# Altium PCB LED Bar.PcbDoc
Units mm, origin at the board's own origin, x right, y up, seen from the top; angles counter-clockwise.
Board outline 55 x 24 mm, 2 copper layers (Top Layer, Bottom Layer); 8 components, 12 nets, 30 pads, 0 vias.
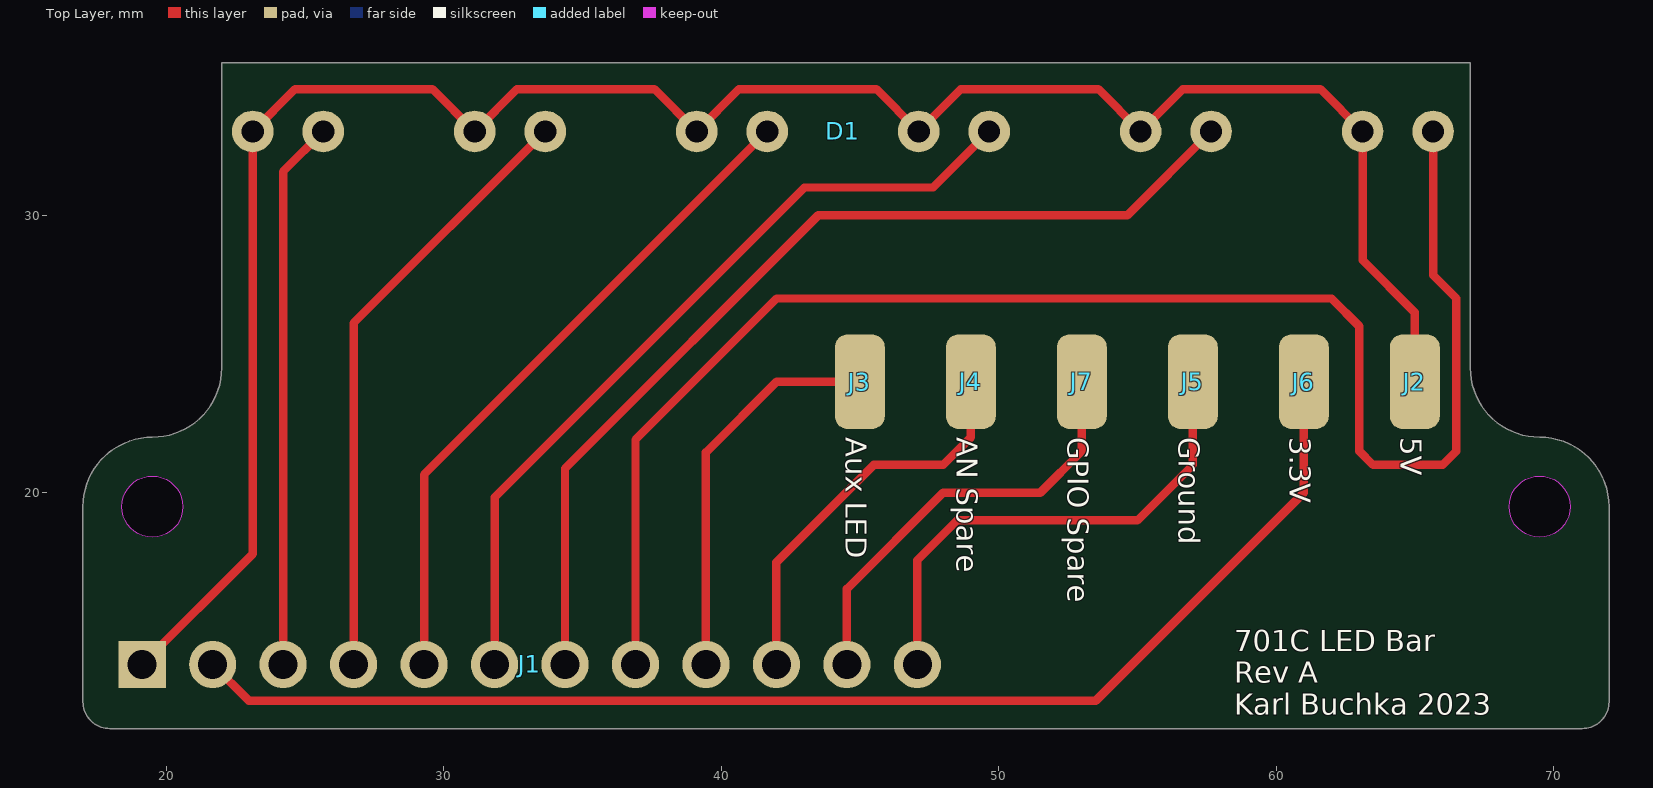
[diagram p0: Top Layer view]
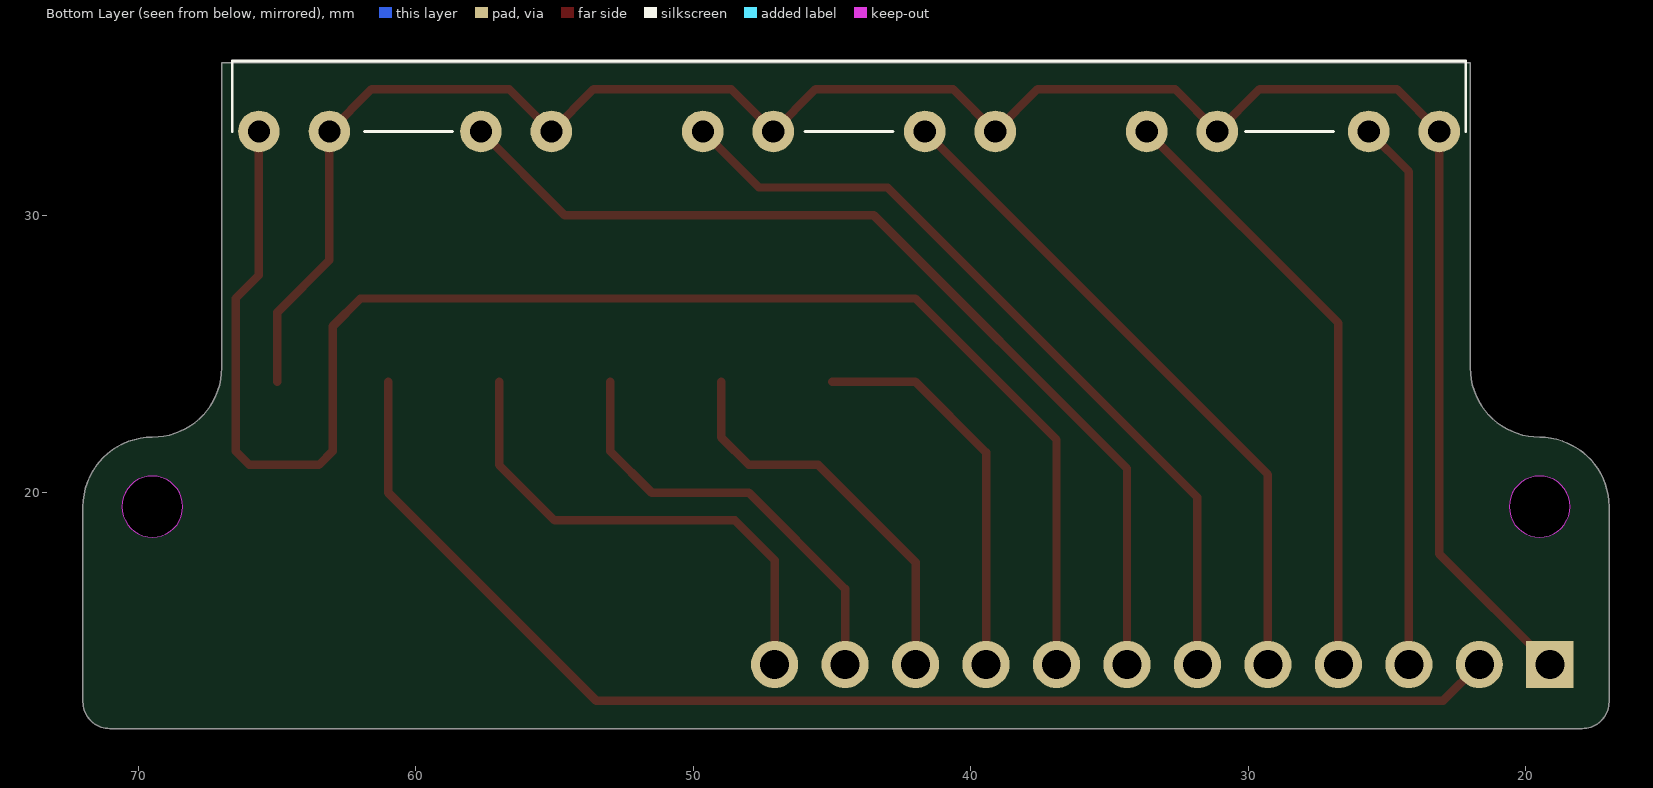
[diagram p1: Bottom Layer view, seen from below]

## Layer stack, top to bottom
Top Solder: solder mask 0.0102, Solder Resist, Dk 3.5
Top Layer: signal copper 0.0356
Dielectric 1: dielectric 0.32, FR-4, Dk 4.8
Bottom Layer: signal copper 0.0356
Bottom Solder: solder mask 0.0102, Solder Resist, Dk 3.5

## Board outline
17,12.464 ccw(c17.964,12.464) 17.964,11.5 71.036,11.5 ccw(c71.036,12.464) 72,12.464 72,19.5 ccw(c69.5,19.5) 69.5,22 cw(c69.5,24.5) 67,24.5 67,35.5 22,35.5 22,24.5 cw(c19.5,24.5) 19.5,22 ccw(c19.5,19.5) 17,19.5
cut-out: 69.5,18.4 cw(c69.5,19.5) 68.4,19.5 cw(c69.5,19.5) 69.5,20.6 cw(c69.5,19.5) 70.6,19.5 cw(c69.5,19.5)
cut-out: 19.5,18.4 cw(c19.5,19.5) 18.4,19.5 cw(c19.5,19.5) 19.5,20.6 cw(c19.5,19.5) 20.6,19.5 cw(c19.5,19.5)

## Design rules (kind name [scope] priority, off if disabled: settings)
Clearance [All] p1: gap=0.254 ignorepadtopadclearanceinfootprint=FALSE except(0: Arc-Hole Track-Hole SMDPad-Hole THPad-Hole Via-Hole Fill-Hole Poly-Hole Region-Hole Text-Hole)
PolygonConnect [All] p1: connectstyle=Relief reliefconductorwidth=0.254 reliefentries=4 polygonreliefangle="90 Angle" airgapwidth=0.254
RoomDefinition "LED Bar" [InComponentClass('LED Bar')] p1 off: confinementstyle=ConfineIn formatcopy=TRUE lockcomponents=FALSE outline 20.32,23.114 186.055,23.114 186.055,128.905 20.32,128.905
RoutingVias [All] p1: holewidth=0.711 width=1.27 viastyle="Through Hole" minholewidth=0.711 minwidth=1.27 maxholewidth=0.711 maxwidth=1.27
SolderMaskExpansion [All] p1: expansion=0.102
Width [All] p1: maxlimit=0.508 minlimit=0.254 preferedwidth=0.305 minimp=50.000000 maximp=50.000000 favimp=50.000000
30 further rules are at their usual default settings.

## Components (designator, comment, footprint, x,y, rotation, side; value= is the part's Value field where it differs from the comment)
D1 "Thinkpad 701C LED Bar" "TP701C LED Bar" 23.119,33.02 r0 top
J1 "PREC012SAAN-RC" PREC012SAAN-RC 19.133,13.809 r90 top
J2 "RCS-0C" RCS-0C 65,24 r0 top
J3 "RCS-0C" RCS-0C 45,24 r0 top
J4 "RCS-0C" RCS-0C 49,24 r0 top
J5 "RCS-0C" RCS-0C 57,24 r0 top
J6 "RCS-0C" RCS-0C 61,24 r0 top
J7 "RCS-0C" RCS-0C 53,24 r0 top

## Footprints (in the part's own frame and the unit in brackets; to place one, negate y for a bottom-side part, rotate by r counter-clockwise, add the part's x,y. Pads: shape width x height; smd on the part's side, far side on the other; paste and mask are expansions set on the pad)
PREC012SAAN-RC [mm] "CONN HDR 12POS 0.1 TIN PCB"
  rect 1.7x1.7 hole 1.05: 1(0,0)
  round 1.7 hole 1.05: 2(0,-2.54) 3(0,-5.08) 4(0,-7.62) 5(0,-10.16) 6(0,-12.7) 7(0,-15.24) 8(0,-17.78) 9(0,-20.32) 10(0,-22.86) 11(0,-25.4) 12(0,-27.94)
  body extent -1.28,-29.2 1.26,1.28, height 8.33
RCS-0C [mm] "1206 Test Point"
  rrect50% 1.8x3.4 smd: 1(0,0)
"TP701C LED Bar" [mm]
  round 1.5 hole 0.8 unplated: 1(0,0) 2(2.54,0) 3(8,0) 4(10.54,0) 5(16,0) 6(18.54,0) 7(24,0) 8(26.54,0) 9(32,0) 10(34.54,0) 11(40,0) 12(42.54,0)

## Part data
J1: "CONN HDR 12POS 0.1 TIN PCB"

## Nets (pads, with @x,y where several pads share a name; then routed paths per layer and width w, separated by ;. In a path a pad name is that pad's centre, name@x,y a point inside that pad or via, vN(x,y) a via of type N, cw(c..) or ccw(c..) an arc to the next point about the centre after c; other vN are vias at no path point)
3V3: J1.2 J6.1 | length 47
  Top Layer w0.305: J1.2 22.982,12.5 53.5,12.5 61,20 J6.1
5V: D1.1 D1.3 D1.5 D1.7 D1.9 D1.11 J1.1 J2.1 | length 77
  Top Layer w0.305: J1.1 23.119,17.795 D1.1 24.643,34.544 29.595,34.544 D1.3 32.643,34.544 37.595,34.544 D1.5 40.643,34.544 45.595,34.544 D1.7 48.643,34.544 53.595,34.544 D1.9 56.643,34.544 61.595,34.544 D1.11 63.119,28.381 65,26.5 J2.1
"AN Spare": J1.10 J4.1 | length 14.6
  Top Layer w0.305: J1.10 41.993,17.493 45.5,21 48,21 49,22 J4.1
Aux_LED: J1.9 J3.1 | length 14.2
  Top Layer w0.305: J1.9 39.453,21.453 42,24 J3.1
CapsL_LED: D1.8 J1.6 | length 29.3
  Top Layer w0.305: J1.6 31.833,19.833 43,31 47.639,31 D1.8
Charge_LED: D1.2 J1.3 | length 19.8
  Top Layer w0.305: J1.3 24.213,31.574 D1.2
GND: J1.12 J5.1 | length 18.1
  Top Layer w0.305: J1.12 47.073,17.573 48.5,19 55,19 57,21 J5.1
"GPIO Spare": J1.11 J7.1 | length 15.7
  Top Layer w0.305: J1.11 44.533,16.533 48,20 51.5,20 53,21.5 J7.1
HDD_LED: D1.4 J1.4 | length 22.1
  Top Layer w0.305: J1.4 26.753,26.114 D1.4
NumL_LED: D1.6 J1.5 | length 24.3
  Top Layer w0.305: J1.5 29.293,20.654 D1.6
PWR_LED: D1.12 J1.8 | length 57
  Top Layer w0.305: J1.8 36.913,21.913 42,27 62,27 63,26 63,21.5 63.5,21 66,21 66.5,21.5 66.5,27 65.659,27.841 D1.12
ScrL_LED: D1.10 J1.7 | length 35.4
  Top Layer w0.305: J1.7 34.373,20.873 43.5,30 54.639,30 D1.10

## Silkscreen, mask and mechanical layers (free items; w line width, h text height)
Top Overlay:
  text "Aux LED" at 44.5,22 h0.76 r270
  text "AN Spare" at 48.5,22 h0.76 r270
  text "GPIO Spare" at 52.5,22 h0.76 r270
  text "Ground" at 56.5,22 h0.76 r270
  text "3.3V" at 60.5,22 h0.76 r270
  text "5V" at 64.5,22 h0.76 r270
  text "701C LED Bar / Rev A / Karl Buchka 2023" at 58.5,12 h0.76
Mechanical 2:
  circle w0.1: c69.5,19.5 r1.1
  circle w0.1: c19.5,19.5 r1.1
  circle w0.1: c19.133,13.809 r0.828
  lines w0.1: 17,12.464 ccw(c17.964,12.464) 17.964,11.5 71.036,11.5 ccw(c71.036,12.464) 72,12.464 72,19.5 ccw(c69.5,19.5) 69.5,22 cw(c69.5,24.5) 67,24.5 67,35.5 22,35.5 22,24.5 cw(c19.5,24.5) 19.5,22 ccw(c19.5,19.5) 17,19.5 17,12.464 ; 21.503,13.639 21.503,13.979 21.843,13.979 21.843,13.639 21.503,13.639 ; 24.043,13.639 24.043,13.979 24.383,13.979 24.383,13.639 24.043,13.639 ; 26.583,13.639 26.583,13.979 26.923,13.979 26.923,13.639 26.583,13.639 ; 29.123,13.639 29.123,13.979 29.463,13.979 29.463,13.639 29.123,13.639 ; 31.663,13.639 31.663,13.979 32.003,13.979 32.003,13.639 31.663,13.639 ; 34.203,13.639 34.203,13.979 34.543,13.979 34.543,13.639 34.203,13.639 ; 36.743,13.639 36.743,13.979 37.083,13.979 37.083,13.639 36.743,13.639 ; 39.283,13.639 39.283,13.979 39.623,13.979 39.623,13.639 39.283,13.639 ; 41.823,13.639 41.823,13.979 42.163,13.979 42.163,13.639 41.823,13.639 ; 44.363,13.639 44.363,13.979 44.703,13.979 44.703,13.639 44.363,13.639 ; 46.903,13.639 46.903,13.979 47.243,13.979 47.243,13.639 46.903,13.639
Board Outline:
  circle w0.1: c69.5,19.5 r1.1
  circle w0.1: c19.5,19.5 r1.1
  lines w0.1: 17,12.464 ccw(c17.964,12.464) 17.964,11.5 71.036,11.5 ccw(c71.036,12.464) 72,12.464 72,19.5 ccw(c69.5,19.5) 69.5,22 cw(c69.5,24.5) 67,24.5 67,35.5 22,35.5 22,24.5 cw(c19.5,24.5) 19.5,22 ccw(c19.5,19.5) 17,19.5 17,12.464

## Dimensions
71.036,11.5 to 67,35.5 on Mechanical 2
17,12.464 to 72,19.5 on Mechanical 2